# Altium PCB extensionV1.0.PcbDoc (part 1 of 2)
Units mm, origin at the board's own origin, x right, y up, seen from the top; angles counter-clockwise.
Board outline 110.36 x 57.4 mm, 2 copper layers (Top Layer, Bottom Layer); 166 components, 161 nets, 516 pads, 220 vias.
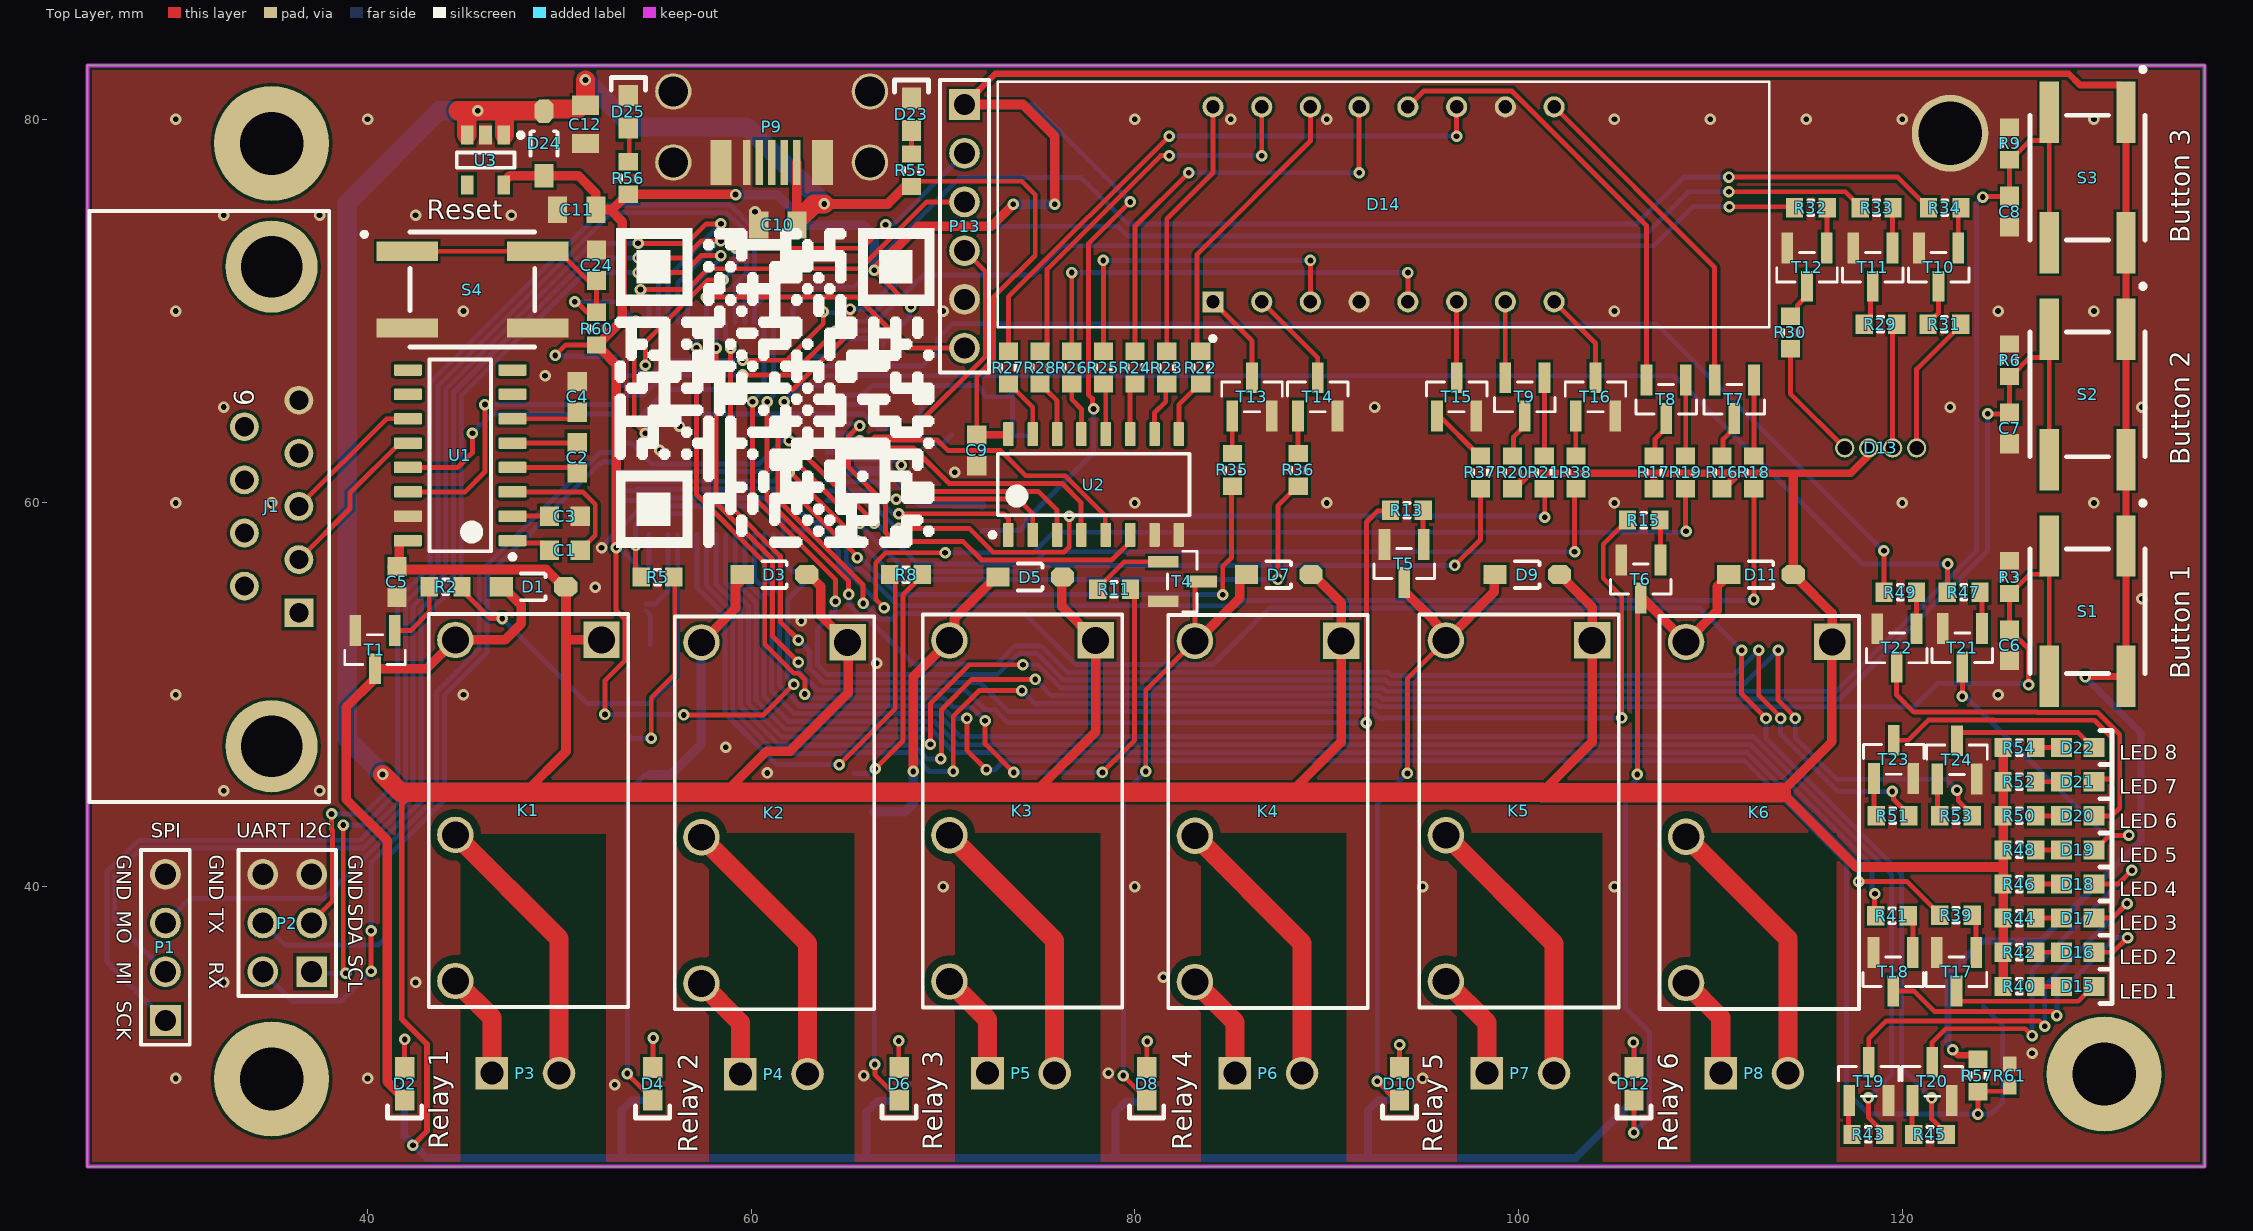
[diagram p0: Top Layer view]
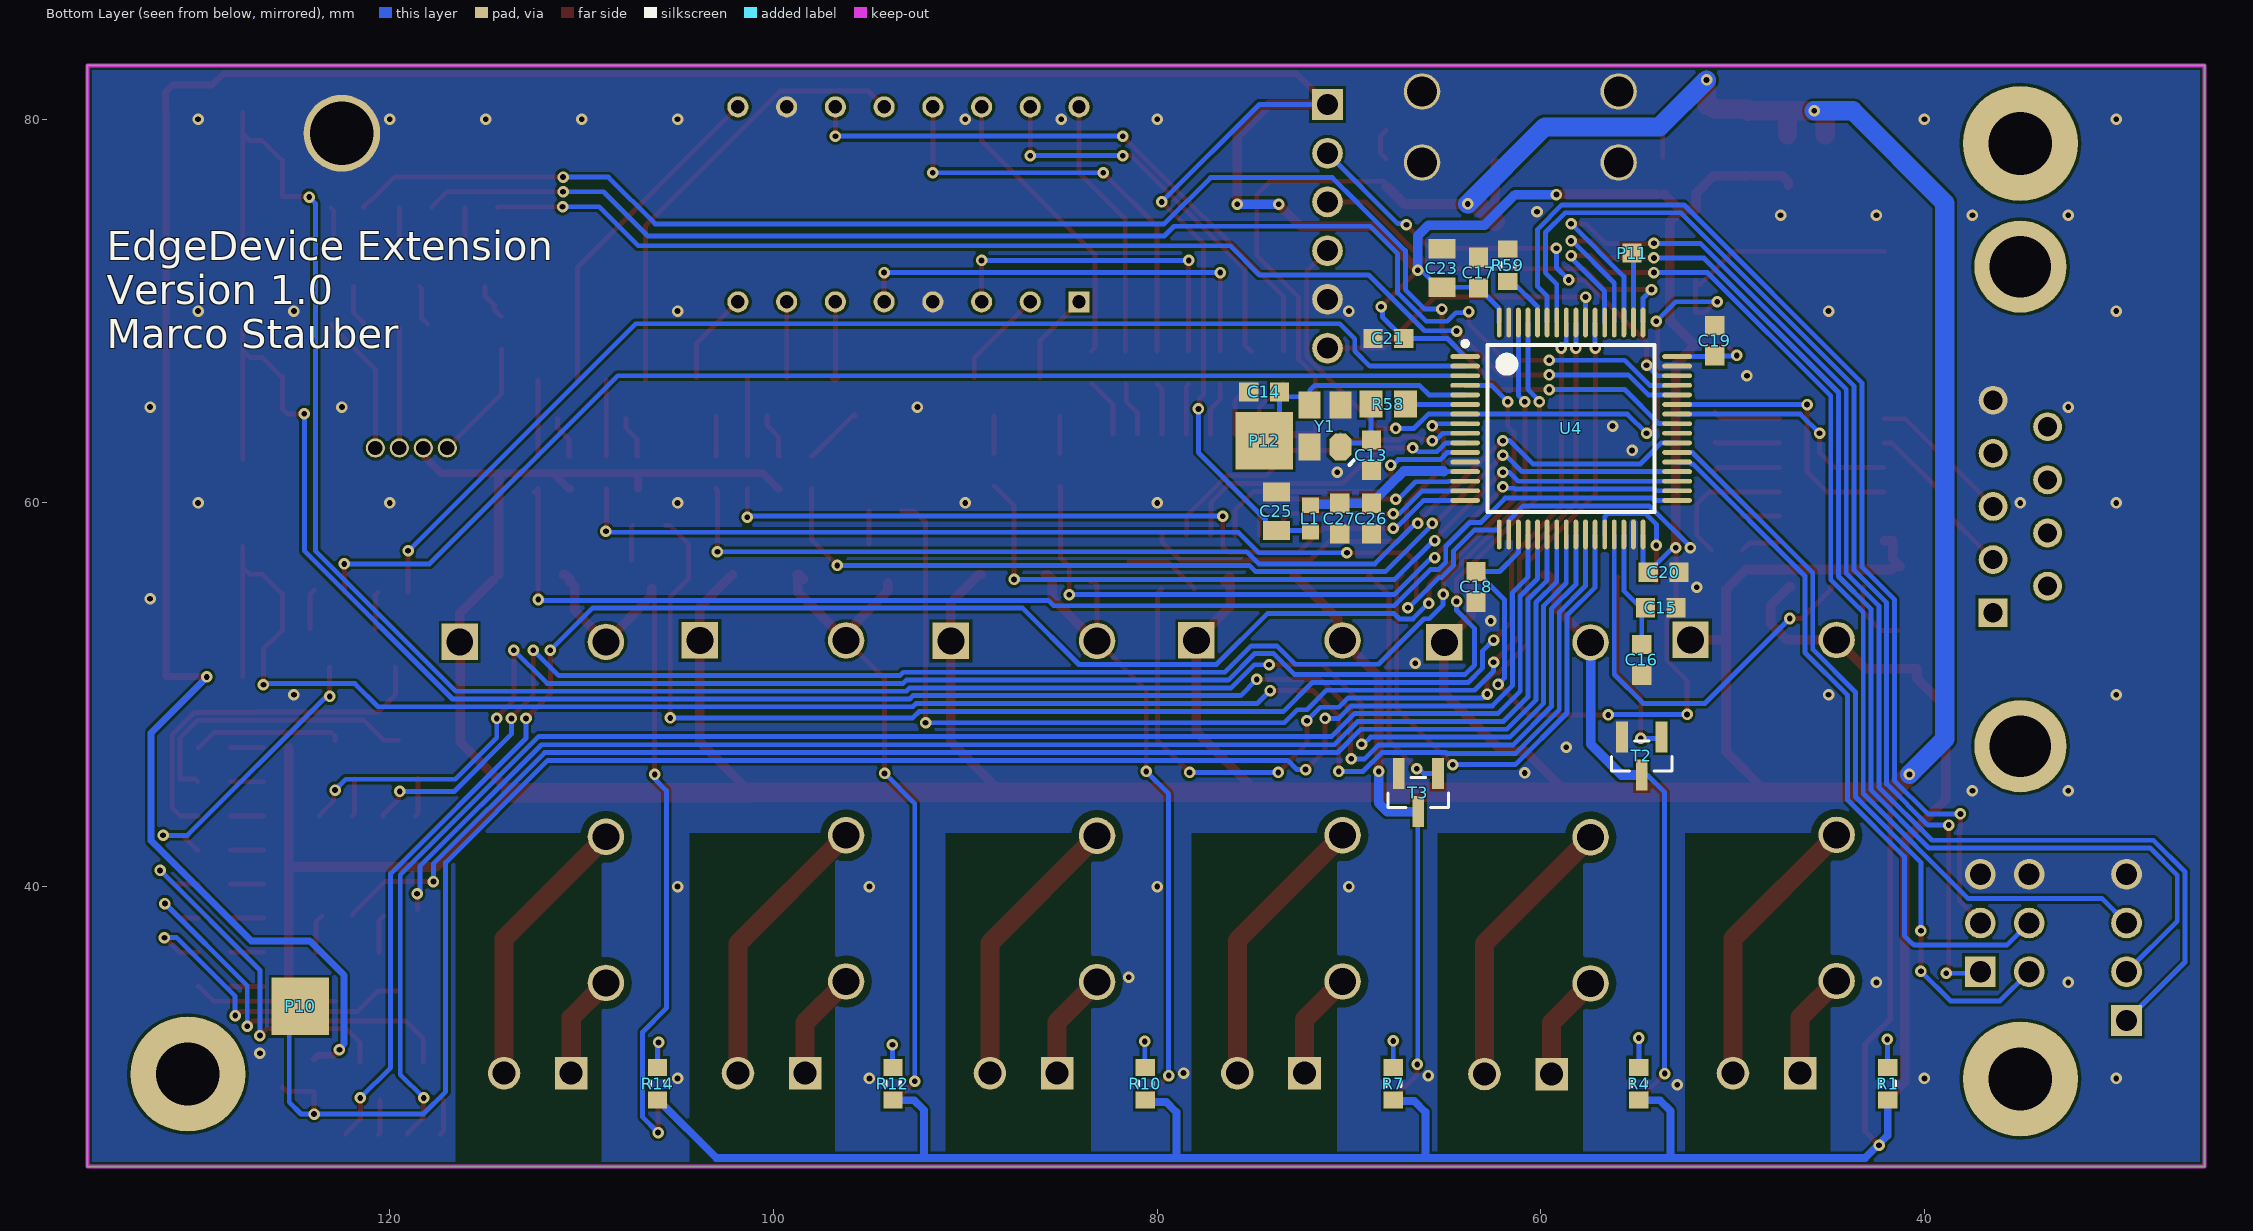
[diagram p1: Bottom Layer view, seen from below]
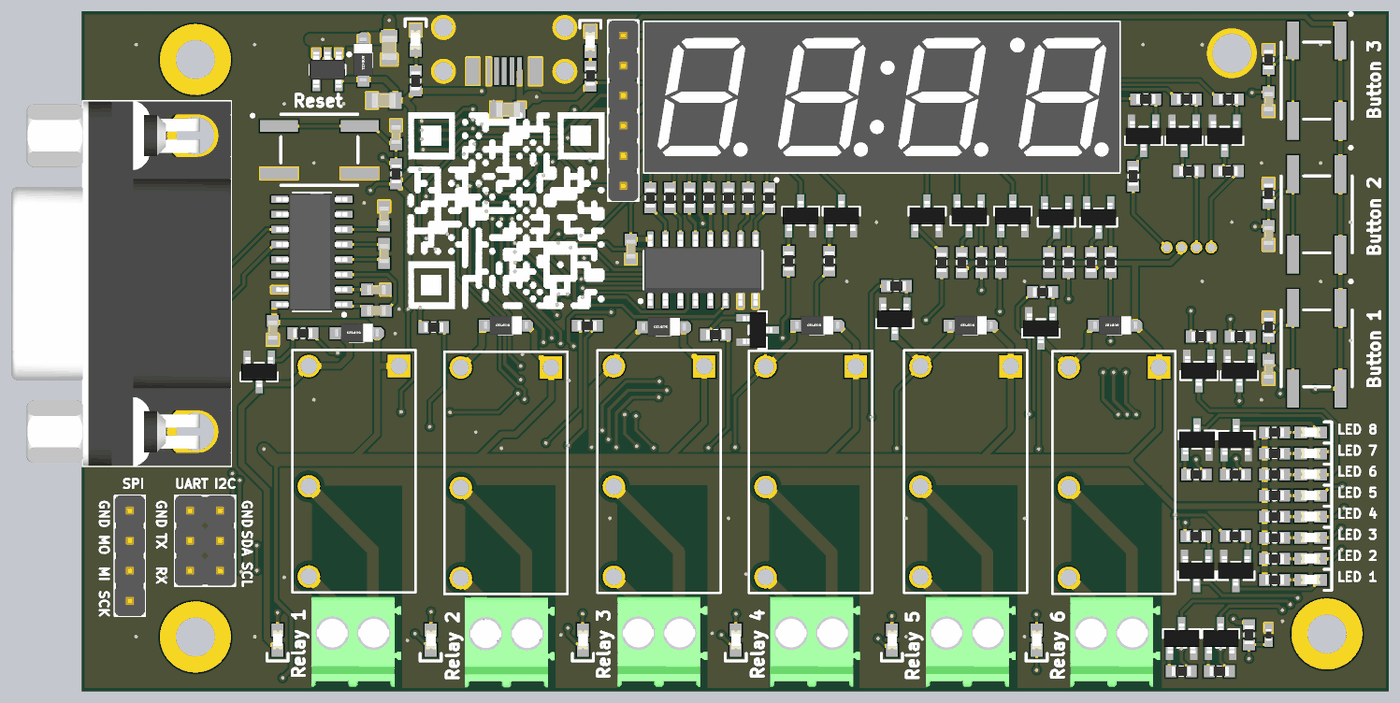
[diagram p3: 3D render of the assembled board from above, using the file's embedded part models]
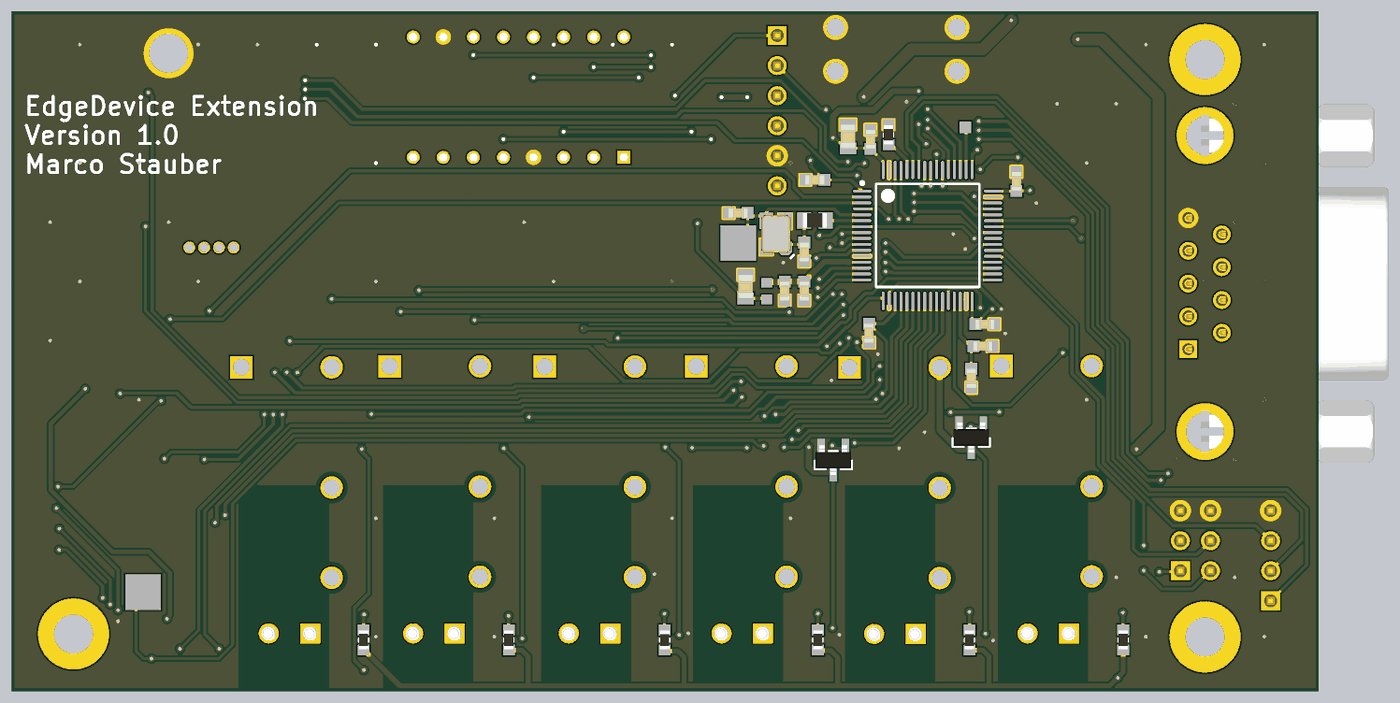
[diagram p4: 3D render of the assembled board from below, using the file's embedded part models]

## Layer stack, top to bottom
Top Solder: solder mask 0.0102, Solder Resist, Dk 3.5
Top Layer: signal copper 0.0356
Dielectric 1: dielectric 0.32, FR-4, Dk 4.8
Bottom Layer: signal copper 0.0356
Bottom Solder: solder mask 0.0102, Solder Resist, Dk 3.5

## Board outline
25.4,25.4 135.763,25.4 135.763,82.804 25.4,82.804

## Design rules (kind name [scope] priority, off if disabled: settings)
Clearance "Schematic Clearance Constraint_11" [InNet('NetK1_2')] p1: gap=0.4 ignorepadtopadclearanceinfootprint=FALSE
Clearance "Schematic Clearance Constraint_10" [InNet('NetK1_3')] p2: gap=0.4 ignorepadtopadclearanceinfootprint=FALSE
Clearance "Schematic Clearance Constraint_9" [InNet('NetK2_3')] p3: gap=0.4 ignorepadtopadclearanceinfootprint=FALSE
Clearance "Schematic Clearance Constraint_8" [InNet('NetK6_3')] p4: gap=0.4 ignorepadtopadclearanceinfootprint=FALSE
Clearance "Schematic Clearance Constraint_7" [InNet('NetK4_2')] p5: gap=0.4 ignorepadtopadclearanceinfootprint=FALSE
Clearance "Schematic Clearance Constraint_6" [InNet('NetK4_3')] p6: gap=0.4 ignorepadtopadclearanceinfootprint=FALSE
Clearance "Schematic Clearance Constraint_5" [InNet('NetK3_2')] p7: gap=0.4 ignorepadtopadclearanceinfootprint=FALSE
Clearance "Schematic Clearance Constraint_4" [InNet('NetK3_3')] p8: gap=0.4 ignorepadtopadclearanceinfootprint=FALSE
Clearance "Schematic Clearance Constraint" [InNet('NetK2_2')] p9: gap=0.4 ignorepadtopadclearanceinfootprint=FALSE
Clearance "Schematic Clearance Constraint_3" [InNet('NetK5_2')] p10: gap=0.4 ignorepadtopadclearanceinfootprint=FALSE
Clearance "Schematic Clearance Constraint_2" [InNet('NetK5_3')] p11: gap=0.4 ignorepadtopadclearanceinfootprint=FALSE
Clearance "Schematic Clearance Constraint_1" [InNet('NetK6_2')] p12: gap=0.4 ignorepadtopadclearanceinfootprint=FALSE
Clearance [All] p13: gap=0.152 ignorepadtopadclearanceinfootprint=FALSE
Height [All] p1: minheight=0 maxheight=50 prefheight=12.7
HoleSize [All] p1: absolutevalues=TRUE maxlimit=5.6 minlimit=0.3 maxpercent=80.000 minpercent=20.000
HoleToHoleClearance [All] p1: gap=0.305 allowstackedmicrovias=TRUE
MinimumSolderMaskSliver [All] p1: minsoldermaskwidth=0.152
PlaneConnect [All] p1: planeconnectstyle=Direct reliefexpansion=0.508 reliefentries=4 reliefconductorwidth=0.254 reliefairgap=0.254
PolygonConnect [All] p1: connectstyle=Direct reliefconductorwidth=0.254 reliefentries=4 polygonreliefangle="90 Angle" airgapwidth=0.254
RoomDefinition U_uc [InComponentClass('U_uc')] p1 off: confinementstyle=ConfineIn formatcopy=TRUE lockcomponents=FALSE outline 0,0 50.8,0 50.8,25.4 0,25.4
RoomDefinition U_sensor [InComponentClass('U_sensor')] p2 off: confinementstyle=ConfineIn formatcopy=TRUE lockcomponents=FALSE outline 0,0 50.8,0 50.8,25.4 0,25.4
RoomDefinition U_PWR [InComponentClass('U_PWR')] p3 off: confinementstyle=ConfineIn formatcopy=TRUE lockcomponents=FALSE outline 0,0 50.8,0 50.8,25.4 0,25.4
RoomDefinition U_led [InComponentClass('U_led')] p4 off: confinementstyle=ConfineIn formatcopy=TRUE lockcomponents=FALSE outline 0,0 50.8,0 50.8,25.4 0,25.4
RoomDefinition U_IO [InComponentClass('U_IO')] p5 off: confinementstyle=ConfineIn formatcopy=TRUE lockcomponents=FALSE outline 0,0 50.8,0 50.8,25.4 0,25.4
RoomDefinition U_COM [InComponentClass('U_COM')] p6 off: confinementstyle=ConfineIn formatcopy=TRUE lockcomponents=FALSE outline 0,0 50.8,0 50.8,25.4 0,25.4
RoomDefinition extension [InComponentClass('extension')] p7 off: confinementstyle=ConfineIn formatcopy=TRUE lockcomponents=FALSE outline 0,0 50.8,0 50.8,25.4 0,25.4
RoutingVias [All] p1: holewidth=0.3 width=0.6 viastyle="Through Hole" minholewidth=0.3 minwidth=0.6 maxholewidth=5.2 maxwidth=8
SolderMaskExpansion [All] p1: expansion=0.102
UnRoutedNet [All] p1: checkbadconnections=TRUE
Width [All] p1: maxlimit=20 minlimit=0.152 preferedwidth=0.152
24 further rules are at their usual default settings.

## Classes and differential pairs
component class U_PWR: C10 C11 C12 D23 D24 D25 P9 R55 R56 U U3
component class U_uc: C13 C14 C15 C16 C17 C18 C19 C20 C21 C23 C24 C25 C26 C27 L1 P11 P12 P13 R58 R59 R60 S4 U4 Y1
component class U_sensor: P10 R57 R61
component class U_led: C9 D13 D14 D15 D16 D17 D18 D19 D20 D21 D22 R16 R17 R18 R19 R20 R21 R22 R23 R24 R25 R26 R27 R28 R29 R30 R31 R32 R33 R34 R35 R36 R37 R38 R39 R40 R41 R42 R43 R44 R45 R46 R47 R48 R49 R50 R51 R52 R53 R54 T7 T8 T9 T10 T11 T12 T13 T14 T15 T16 T17 T18 T19 T20 T21 T22 T23 T24 U2
component class U_IO: C6 C7 C8 D1 D2 D3 D4 D5 D6 D7 D8 D9 D10 D11 D12 K1 K2 K3 K4 K5 K6 P3 P4 P5 P6 P7 P8 R1 R2 R3 R4 R5 R6 R7 R8 R9 R10 R11 R12 R13 R14 R15 S1 S2 S3 T1 T2 T3 T4 T5 T6
component class U_COM: C1 C2 C3 C4 C5 J1 U1
component class extension: P1 P2

## Components (designator, comment, footprint, x,y, rotation, side; value= is the part's Value field where it differs from the comment)
C1 "1uF" "CAP_0603i_1608m -N" 50.292,57.531 r0 top
C2 "1uF" "CAP_0603i_1608m -N" 50.927,62.357 r270 top
C3 "1uF" "CAP_0603i_1608m -N" 50.292,59.309 r180 top
C4 "1uF" "CAP_0603i_1608m -N" 50.927,65.532 r270 top
C5 "1uF" "CAP_0603i_1608m -N" 41.529,55.88 r90 top
C6 "100nF" "CAP_0603i_1608m -N" 125.603,52.578 r90 top
C7 "100nF" "CAP_0603i_1608m -N" 125.603,63.881 r90 top
C8 "100nF" "CAP_0603i_1608m -N" 125.603,75.184 r90 top
C9 "100nF" "CAP_0603i_1608m -N" 71.755,62.738 r90 top
C10 "10uF" "CAP_0805i_2012m -N" 61.392,74.498 r0 top
C11 "10uF" "CAP_0805i_2012m -N" 50.902,75.286 r0 top
C12 "10uF" "CAP_0805i_2012m -N" 51.359,79.731 r90 top
C13 "22pF" "CAP_0603i_1608m -N" 68.834,62.484 r90 bottom
C14 "22pF" "CAP_0603i_1608m -N" 74.422,65.786 r180 bottom
C15 "1uF" "CAP_0603i_1608m -N" 53.746,54.534 r0 bottom
C16 "1uF" "CAP_0603i_1608m -N" 54.737,51.816 r90 bottom
C17 "100nF" "CAP_0603i_1608m -N" 63.246,72.009 r90 bottom
C18 "100nF" "CAP_0603i_1608m -N" 63.373,55.626 r90 bottom
C19 "100nF" "CAP_0603i_1608m -N" 50.927,68.453 r270 bottom
C20 "100nF" "CAP_0603i_1608m -N" 53.594,56.388 r180 bottom
C21 "100nF" "CAP_0603i_1608m -N" 67.945,68.58 r180 bottom
C23 "10uF" "CAP_0805i_2012m -N" 65.151,72.247 r270 bottom
C24 "100nF" "CAP_0603i_1608m -N" 51.943,72.39 r270 top
C25 "10uF" "CAP_0805i_2012m -N" 73.787,59.563 r270 bottom
C26 "100nF" "CAP_0603i_1608m -N" 68.834,59.182 r90 bottom
C27 "1uF" "CAP_0603i_1608m -N" 70.485,59.182 r90 bottom
D1 "Diode  Schottky" SOD123 48.641,55.626 r180 top
D2 "Orange" *0603 41.935,29.718 r90 top
D3 "Diode  Schottky" SOD123 61.214,56.261 r180 top
D4 "Orange" *0603 54.864,29.718 r90 top
D5 "Diode  Schottky" SOD123 74.549,56.134 r180 top
D6 "Orange" *0603 67.716,29.718 r90 top
D7 "Diode  Schottky" SOD123 87.503,56.261 r180 top
D8 "Orange" *0603 80.62,29.718 r90 top
D9 "Diode  Schottky" SOD123 100.457,56.261 r180 top
D10 "Orange" *0603 93.802,29.718 r90 top
D11 "Diode  Schottky" SOD123 112.649,56.261 r180 top
D12 "Orange" *0603 106.02,29.718 r90 top
D13 "848" Adafruit-848 120.757,62.865 r180 top
D14 "7 Segment" TDCG1060M 92.964,75.565 r0 top
D15 "Grün" *0603 129.159,34.798 r180 top
D16 "Grün" *0603 129.159,36.576 r180 top
D17 "Grün" *0603 129.159,38.354 r180 top
D18 "Grün" *0603 129.159,40.132 r180 top
D19 "Grün" *0603 129.159,41.91 r180 top
D20 "Grün" *0603 129.159,43.688 r180 top
D21 "Grün" *0603 129.159,45.466 r180 top
D22 "Grün" *0603 129.159,47.244 r180 top
D23 "Grün" *0603 68.351,80.264 r270 top
D24 "Diode  Schottky" SOD123 49.2,78.74 r270 top
D25 "Grün" *0603 53.594,80.391 r270 top
J1 "618009231121" 618009231121 31.75,59.817 r270 top
K1 "ALQ305" PNSC-LQ-4-2000x1000x1600_V 52.197,52.857 r270 top
K2 "ALQ305" PNSC-LQ-4-2000x1000x1600_V 65.024,52.73 r270 top
K3 "ALQ305" PNSC-LQ-4-2000x1000x1600_V 77.953,52.832 r270 top
K4 "ALQ305" PNSC-LQ-4-2000x1000x1600_V 90.754,52.807 r270 top
K5 "ALQ305" PNSC-LQ-4-2000x1000x1600_V 103.835,52.832 r270 top
K6 "ALQ305" PNSC-LQ-4-2000x1000x1600_V 116.357,52.756 r270 top
L1 "Inductor" "IND_0603i_1608m -L" 72.009,59.182 r270 bottom
P1 "Header 4" HDR1X4 29.464,33.02 r90 top
P2 "Header 3X2" HDR2X3 37.084,35.56 r90 top
P3 "Header 2" "3.5MM Phoenix Contact 1984617" 46.482,30.272 r0 top
P4 "Header 2" "3.5MM Phoenix Contact 1984617" 59.436,30.226 r0 top
P5 "Header 2" "3.5MM Phoenix Contact 1984617" 72.319,30.272 r0 top
P6 "Header 2" "3.5MM Phoenix Contact 1984617" 85.217,30.272 r0 top
P7 "Header 2" "3.5MM Phoenix Contact 1984617" 98.354,30.272 r0 top
P8 "Header 2" "3.5MM Phoenix Contact 1984617" 110.546,30.272 r0 top
P9 "USB Micro B" MCR-B-S-RA-SMT-EH4B-T/R 61.066,77.749 r180 top
P10 "Temp" Pad_3x3mm 124.663,33.757 r180 bottom
P11 "JTDI" Pad_0603 55.245,73.025 r90 bottom
P12 "MC" Pad_3x3mm 74.422,63.246 r0 bottom
P13 "Header 6" HDR1X6 71.12,80.772 r270 top
R1 "270" "RES_0603i_1608m -N" 41.91,29.718 r270 bottom
R2 "3k" "RES_0603i_1608m -N" 44.069,55.626 r0 top
R3 "10k" "RES_0603i_1608m -N" 125.603,56.134 r270 top
R4 "270" "RES_0603i_1608m -N" 54.889,29.718 r270 bottom
R5 "3k" "RES_0603i_1608m -N" 55.118,56.134 r180 top
R6 "10k" "RES_0603i_1608m -N" 125.603,67.437 r270 top
R7 "270" "RES_0603i_1608m -N" 67.691,29.718 r270 bottom
R8 "3k" "RES_0603i_1608m -N" 68.072,56.261 r180 top
R9 "10k" "RES_0603i_1608m -N" 125.603,78.74 r270 top
R10 "270" "RES_0603i_1608m -N" 80.62,29.718 r270 bottom
R11 "3k" "RES_0603i_1608m -N" 78.918,55.499 r0 top
R12 "270" "RES_0603i_1608m -N" 93.777,29.718 r270 bottom
R13 "3k" "RES_0603i_1608m -N" 94.183,59.614 r180 top
R14 "270" "RES_0603i_1608m -N" 106.045,29.718 r270 bottom
R15 "3k" "RES_0603i_1608m -N" 106.528,59.106 r180 top
R16 "270" "RES_0603i_1608m -N" 110.617,61.595 r270 top
R17 "270" "RES_0603i_1608m -N" 107.061,61.595 r270 top
R18 "11k" "RES_0603i_1608m -N" 112.268,61.595 r270 top
R19 "11k" "RES_0603i_1608m -N" 108.712,61.595 r270 top
R20 "270" "RES_0603i_1608m -N" 99.695,61.595 r90 top
R21 "11k" "RES_0603i_1608m -N" 101.346,61.595 r90 top
R22 "270" "RES_0603i_1608m -N" 83.439,67.056 r270 top
R23 "270" "RES_0603i_1608m -N" 81.661,67.056 r270 top
R24 "270" "RES_0603i_1608m -N" 80.01,67.056 r270 top
R25 "270" "RES_0603i_1608m -N" 78.359,67.056 r270 top
R26 "270" "RES_0603i_1608m -N" 76.708,67.056 r270 top
R27 "270" "RES_0603i_1608m -N" 73.406,67.056 r270 top
R28 "270" "RES_0603i_1608m -N" 75.057,67.056 r270 top
R29 "270" "RES_0603i_1608m -N" 118.872,69.317 r0 top
R30 "270" "RES_0603i_1608m -N" 114.173,68.885 r270 top
R31 "270" "RES_0603i_1608m -N" 122.199,69.317 r0 top
R32 "11k" "RES_0603i_1608m -N" 115.24,75.387 r0 top
R33 "11k" "RES_0603i_1608m -N" 118.669,75.387 r0 top
R34 "11k" "RES_0603i_1608m -N" 122.225,75.387 r0 top
R35 "11k" "RES_0603i_1608m -N" 85.09,61.722 r90 top
R36 "11k" "RES_0603i_1608m -N" 88.519,61.722 r90 top
R37 "11k" "RES_0603i_1608m -N" 98.019,61.595 r90 top
R38 "11k" "RES_0603i_1608m -N" 102.997,61.595 r90 top
R39 "165k" "RES_0603i_1608m -N" 122.809,38.506 r180 top
R40 "3k" "RES_0603i_1608m -N" 126.111,34.798 r180 top
R41 "165k" "RES_0603i_1608m -N" 119.47,38.481 r180 top
R42 "3k" "RES_0603i_1608m -N" 126.111,36.576 r180 top
R43 "165k" "RES_0603i_1608m -N" 118.237,27.076 r0 top
R44 "3k" "RES_0603i_1608m -N" 126.111,38.354 r180 top
R45 "165k" "RES_0603i_1608m -N" 121.451,27.076 r0 top
R46 "3k" "RES_0603i_1608m -N" 126.111,40.132 r180 top
R47 "165k" "RES_0603i_1608m -N" 123.206,55.344 r180 top
R48 "3k" "RES_0603i_1608m -N" 126.111,41.91 r180 top
R49 "165k" "RES_0603i_1608m -N" 119.904,55.344 r180 top
R50 "3k" "RES_0603i_1608m -N" 126.111,43.688 r180 top
R51 "165k" "RES_0603i_1608m -N" 119.507,43.688 r0 top
R52 "3k" "RES_0603i_1608m -N" 126.111,45.466 r180 top
R53 "165k" "RES_0603i_1608m -N" 122.809,43.688 r0 top
R54 "3k" "RES_0603i_1608m -N" 126.111,47.244 r180 top
R55 "270" "RES_0603i_1608m -N" 68.351,77.343 r270 top
R56 "270" "RES_0603i_1608m -N" 53.594,76.937 r270 top
R57 "1.3k" "RES_0603i_1608m -N" 123.952,30.15 r270 top
R58 "390" "RES_0805i_2012m -N" 67.945,65.151 r0 bottom
R59 "10k" "RES_0603i_1608m -N" 61.722,72.39 r270 bottom
R60 "10k" "RES_0603i_1608m -N" 51.943,69.088 r90 top
R61 "10k,ptc" "RES_0402i_1005m -N" 125.603,30.15 r270 top
S1 "EVQ-Q2U02W" EVQQ2 129.667,54.356 r270 top
S2 "EVQ-Q2U02W" EVQQ2 129.667,65.659 r270 top
S3 "EVQ-Q2U02W" EVQQ2 129.667,76.962 r270 top
S4 "EVQ-Q2U02W" EVQQ2 45.466,71.12 r0 top
T1 "Part Number: MMBT3904-7-F" SOT-23-M 40.386,52.349 r180 top value=Value
T2 "Part Number: MMBT3904-7-F" SOT-23-M 54.737,46.812 r0 bottom value=Value
T3 "Part Number: MMBT3904-7-F" SOT-23-M 66.387,44.903 r0 bottom value=Value
T4 "Part Number: MMBT3904-7-F" SOT-23-M 82.474,55.905 r270 top value=Value
T5 "Part Number: MMBT3904-7-F" SOT-23-M 94.04,56.841 r180 top value=Value
T6 "Part Number: MMBT3904-7-F" SOT-23-M 106.375,56.032 r180 top value=Value
T7 "Part Number: MMBT3904-7-F" SOT-23-M 111.252,65.405 r180 top value=Value
T8 "Part Number: MMBT3904-7-F" SOT-23-M 107.696,65.405 r180 top value=Value
T9 "Part Number: MMBT3904-7-F" SOT-23-M 100.33,65.532 r180 top value=Value
T10 "Part Number: MMBT3904-7-F" SOT-23-M 121.9,72.288 r180 top value=Value
T11 "Part Number: MMBT3904-7-F" SOT-23-M 118.471,72.288 r180 top value=Value
T12 "Part Number: MMBT3904-7-F" SOT-23-M 115.042,72.288 r180 top value=Value
T13 "Part Number: MMBT3904-7-F" SOT-23-M 86.106,65.532 r0 top value=Value
T14 "Part Number: MMBT3904-7-F" SOT-23-M 89.535,65.532 r0 top value=Value
T15 "Part Number: MMBT3904-7-F" SOT-23-M 96.774,65.532 r0 top value=Value
T16 "Part Number: MMBT3904-7-F" SOT-23-M 104.013,65.532 r0 top value=Value
T17 "Part Number: MMBT3904-7-F" SOT-23-M 122.834,35.56 r180 top value=Value
T18 "Part Number: MMBT3904-7-F" SOT-23-M 119.532,35.56 r180 top value=Value
T19 "Part Number: MMBT3904-7-F" SOT-23-M 118.262,29.845 r0 top value=Value
T20 "Part Number: MMBT3904-7-F" SOT-23-M 121.564,29.845 r0 top value=Value
T21 "Part Number: MMBT3904-7-F" SOT-23-M 123.139,52.451 r180 top value=Value
T22 "Part Number: MMBT3904-7-F" SOT-23-M 119.727,52.447 r180 top value=Value
T23 "Part Number: MMBT3904-7-F" SOT-23-M 119.558,46.634 r0 top value=Value
T24 "Part Number: MMBT3904-7-F" SOT-23-M 122.86,46.609 r0 top value=Value
U1 "MAX232DR" D0016A_N 44.831,62.484 r180 top
U2 "CD4543BM96" D0016A_L 77.851,60.96 r90 top
U3 "MIC5504-3.3YM5-TR" MCHP-SOT-23-M5_V 46.152,77.876 r270 top
U4 "STM32F401RBT6" STM-LQFP64_L 58.42,63.881 r180 bottom
Y1 "XTAL3" "TSX-3225 2*2.5" 71.247,64.008 r270 bottom

## Footprints (in the part's own frame and the unit in brackets; to place one, negate y for a bottom-side part, rotate by r counter-clockwise, add the part's x,y. Pads: shape width x height; smd on the part's side, far side on the other; paste and mask are expansions set on the pad)
"3.5MM Phoenix Contact 1984617" [mm]
  rect 1.7x1.7 hole 1.2: 1(0,0)
  round 1.7 hole 1.2: 2(3.5,0)
  body extent -1.67,-4.53 5.9,3.07, height 25.89
618009231121 [mm] "9 pins, right angled, 8.08mm, with hex screw"
  rect 1.5x1.5 hole 1: 1(5.54,4.67)
  round 1.5 hole 1: 2(2.77,4.67) 3(0,4.67) 4(-2.77,4.67) 5(-5.54,4.67) 6(4.155,1.83) 7(1.385,1.83) 8(-1.385,1.83) 9(-4.155,1.83)
  round 4.8 hole 3.2: M1(-12.5,3.25) M2(12.5,3.25)
  silkscreen extent -15.4,-6.25 15.4,6.25, body extent -15.4,-12.25 15.4,6.25, height 12.55
*0603 [mm]
  rect 1.1x1 smd: 1(-0.85,0) 2(0.85,0)
  silkscreen extent -1.78,-0.89 -1.14,0.89, body extent -0.8,-0.42 0.8,0.38, height 0.8
Adafruit-848 [mm]
  round 1 hole 0.75: 1(2.5,0) 2(3.75,0) 3(1.25,0) 4(0,0)
"CAP_0603i_1608m -N" [mm] "Chip Capacitor, Body 1.6x0.8mm, IPC Medium Density"
  rect 1x1 smd: 1(-0.8,0) 2(0.8,0)
  body extent -0.8,-0.4 0.8,0.4, height 0.8
"CAP_0805i_2012m -N" [mm] "Chip Capacitor, Body 2.0x1.3mm, IPC Medium Density"
  rect 1x1.4 smd: 1(-1,0) 2(1,0)
  body extent -1,-0.62 1,0.63, height 0.6
D0016A_L [mm] "SOIC, 16-Leads, Body 10x4mm, Pitch 1.27mm, IPC High Density"
  rrect18% 1.25x0.55 smd: 1(-2.625,4.445) 2(-2.625,3.175) 3(-2.625,1.905) 4(-2.625,0.635) 5(-2.625,-0.635) 6(-2.625,-1.905) 7(-2.625,-3.175) 8(-2.625,-4.445) 9(2.625,-4.445) 10(2.625,-3.175) 11(2.625,-1.905) 12(2.625,-0.635) 13(2.625,0.635) 14(2.625,1.905) 15(2.625,3.175) 16(2.625,4.445)
  silkscreen extent -2.75,-5 1.6,5.39, body extent -3,-4.95 3,4.95, height 1.59
D0016A_N [mm] "SOIC, 16-Leads, Body 10x4mm, Pitch 1.27mm, IPC Medium Density"
  rrect17% 1.45x0.6 smd: 1(-2.725,4.445) 2(-2.725,3.175) 3(-2.725,1.905) 4(-2.725,0.635) 5(-2.725,-0.635) 6(-2.725,-1.905) 7(-2.725,-3.175) 8(-2.725,-4.445) 9(2.725,-4.445) 10(2.725,-3.175) 11(2.725,-1.905) 12(2.725,-0.635) 13(2.725,0.635) 14(2.725,1.905) 15(2.725,3.175) 16(2.725,4.445)
  silkscreen extent -2.85,-5 1.6,5.42, body extent -3,-4.95 3,4.95, height 1.59
EVQQ2 [mm]
  rect 3.2x1 smd: 1(-3.4,2) 2(-3.4,-2) 3(3.4,-2) 4(3.4,2)
  silkscreen extent -5.75,-3 3.25,3
HDR1X4 [mm] "Connector; Header; 4 Position"
  rect 1.6x1.6 hole 1.1: 1(0,0)
  round 1.6 hole 1.1: 2(2.54,0) 3(5.08,0) 4(7.62,0)
  silkscreen extent -1.27,-1.27 8.89,1.27, body extent -1.27,-1.27 8.89,1.27, height 10.3
HDR1X6 [mm] "Connector; Header; 6 Position"
  rect 1.6x1.6 hole 1.1: 1(0,0)
  round 1.6 hole 1.1: 2(2.54,0) 3(5.08,0) 4(7.62,0) 5(10.16,0) 6(12.7,0)
  silkscreen extent -1.27,-1.27 13.97,1.27, body extent -1.27,-1.27 13.97,1.27, height 10.3
HDR2X3 [mm] "Connector; Header; 3x2 Position"
  rect 1.6x1.6 hole 1.1: 1(0,0)
  round 1.6 hole 1.1: 2(0,2.54) 3(2.54,0) 4(2.54,2.54) 5(5.08,0) 6(5.08,2.54)
  silkscreen extent -1.27,-1.27 6.35,3.81, body extent -1.27,-1.27 6.35,3.81, height 10.3
"IND_0603i_1608m -L" [mm] "Chip Inductor, Body 1.6x0.8mm, IPC High Density"
  rect 0.8x0.9 smd: 1(-0.7,0) 2(0.7,0)
  body extent -0.87,-0.48 0.87,0.48, height 0.71
MCHP-SOT-23-M5_V [mm] "SOT-23, 5-Leads, Body 3x1.7mm, Pitch 0.95mm"
  rect 1x0.66 smd: 1(-1.3,0.95) 2(-1.3,0) 3(-1.3,-0.95) 4(1.3,-0.95) 5(1.3,0.95)
  silkscreen extent -1.42,-1.5 0.4,1.96, body extent -1.5,-1.5 1.5,1.5, height 1.45
MCR-B-S-RA-SMT-EH4B-T/R [mm]
  rect 0.4x2.35 smd: 1(-1.3,0) 2(-0.65,0) 3(0,0) 4(0.65,0) 5(1.3,0)
  round 1.9 hole 1.55: 6(-5.125,0) 6(-5.125,-3.7) 6(5.125,0) 6(5.125,-3.7)
  rect 1.1x2.35 smd: 6(-2.65,0) 6(2.65,0)
Pad_3x3mm [mm]
  rect 3x3 smd: 1(0,0)
Pad_0603 [mm]
  rect 1x1 smd: 1(0,0)
PNSC-LQ-4-2000x1000x1600_V [mm] "LQ, 4-Leads, Body 20x10mm"
  rect 1.9x1.9 hole 1.4: 1(0,0)
  round 1.9 hole 1.4: 2(17.78,-7.62) 3(10.16,-7.62) 4(0,-7.62)
  silkscreen extent -1.35,-9.01 19.13,1.39, body extent -1.31,-9.01 19.09,1.39, height 16.6
"RES_0402i_1005m -N" [mm] "Chip Resistor, Body 1.1x0.5mm, IPC Medium Density"
  rect 0.8x0.7 smd: 1(-0.6,0) 2(0.6,0)
  body extent -0.5,-0.25 0.5,0.25, height 0.3
"RES_0603i_1608m -N" [mm] "Chip Resistor, Body 1.6x0.8mm, IPC Medium Density"
  rect 0.9x1 smd: 1(-0.85,0) 2(0.85,0)
  silkscreen extent -0.13,-0.38 0.13,0.38, body extent -0.8,-0.4 0.8,0.4, height 0.4
"RES_0805i_2012m -N" [mm] "Chip Resistor, Body 2.0x1.3mm, IPC Medium Density"
  rect 1.2x1.4 smd: 1(-0.9,0) 2(0.9,0)
  body extent -1,-0.62 1,0.63, height 0.5
SOD123 [mm] "SOD123  2-Leads, Body, IPC Medium Density"
  rect 1.22x1 smd: 1(1.681,0)
  oct 1.22x1 smd: 2(-1.681,0)
  silkscreen extent -0.64,-0.7 0.64,0.7, body extent -1.85,-0.84 1.85,0.76, height 1.27
SOT-23-M [mm]
  rect 0.61x1.61 smd paste+0 mask+0: 1(-1.025,-0.995) 2(1.025,-0.995) 3(0,0.995)
  silkscreen extent -1.58,-0.78 1.58,0.78, body extent -1.5,-1.25 1.5,1.25, height 1.06
STM-LQFP64_L [mm] "Thin QFP, 64-Leads, Body 10x10mm, Pitch 0.5mm, IPC High Density"
  oval 1.55x0.25 smd: 1(-5.525,3.75) 2(-5.525,3.25) 3(-5.525,2.75) 4(-5.525,2.25) 5(-5.525,1.75) 6(-5.525,1.25) 7(-5.525,0.75) 8(-5.525,0.25) 9(-5.525,-0.25) 10(-5.525,-0.75) 11(-5.525,-1.25) 12(-5.525,-1.75) 13(-5.525,-2.25) 14(-5.525,-2.75) 15(-5.525,-3.25) 16(-5.525,-3.75) 33(5.525,-3.75) 34(5.525,-3.25) 35(5.525,-2.75) 36(5.525,-2.25) 37(5.525,-1.75) 38(5.525,-1.25) 39(5.525,-0.75) 40(5.525,-0.25) 41(5.525,0.25) 42(5.525,0.75) 43(5.525,1.25) 44(5.525,1.75) 45(5.525,2.25) 46(5.525,2.75) 47(5.525,3.25) 48(5.525,3.75)
  oval 0.25x1.55 smd: 17(-3.75,-5.525) 18(-3.25,-5.525) 19(-2.75,-5.525) 20(-2.25,-5.525) 21(-1.75,-5.525) 22(-1.25,-5.525) 23(-0.75,-5.525) 24(-0.25,-5.525) 25(0.25,-5.525) 26(0.75,-5.525) 27(1.25,-5.525) 28(1.75,-5.525) 29(2.25,-5.525) 30(2.75,-5.525) 31(3.25,-5.525) 32(3.75,-5.525) 49(3.75,5.525) 50(3.25,5.525) 51(2.75,5.525) 52(2.25,5.525) 53(1.75,5.525) 54(1.25,5.525) 55(0.75,5.525) 56(0.25,5.525) 57(-0.25,5.525) 58(-0.75,5.525) 59(-1.25,5.525) 60(-1.75,5.525) 61(-2.25,5.525) 62(-2.75,5.525) 63(-3.25,5.525) 64(-3.75,5.525)
  silkscreen extent -5.65,-4.35 4.35,4.55, body extent -5,-5 5,5, height 1.6
TDCG1060M [mm]
  rect 1.1x1.1 hole 0.7: 1(-8.89,-5.08)
  round 1.1 hole 0.7: 2(-6.35,-5.08) 3(-3.81,-5.08) 4(-1.27,-5.08) 5(1.27,-5.08) 6(3.81,-5.08) 7(6.35,-5.08) 8(8.89,-5.08) 9(8.89,5.08) 10(6.35,5.08) 11(3.81,5.08) 12(1.27,5.08) 13(-1.27,5.08) 14(-3.81,5.08) 15(-6.35,5.08) 16(-8.89,5.08)
  silkscreen extent -20.1,-7.12 20.1,6.4, body extent -20.1,-6.4 20.1,6.4, height 7
"TSX-3225 2*2.5" [mm]
  oct 1.4x1.15 smd: 1(1.1,0.8)
  rect 1.4x1.15 smd: 2(-1.1,0.8) 3(-1.1,-0.8) 4(1.1,-0.8)
  silkscreen extent 1.78,1.27 2.03,1.52, body extent -1.6,-1.23 1.6,1.27, height 0.6

## Part data
C1 C2 C3 C4 C5 C6 C7 C8 C9 C10 C11 C12 C13 C14 C15 C16 C17 C18 C19 C20 C21 C23 C24 C25 C26 C27: library part Cap, "capacitor"
D1 D3 D5 D7 D9 D11 D24: "Schottky Diode"
D2 D4 D6 D8 D10 D12: library part LTST-C191KFKT, "LED; SMD; 0603; orange; 45-90mcd; 1.6x0.8x0.55mm; 130°; 2÷2.4V; 20mA", Package="0603 Lite-On", Digi-Key_Part_Number=160-1445-1-ND, Digi-Key_Purchase_URL=https://www.digikey.com/product-detail/en/lite-on-inc/LTST-C191KFKT/160-1445-1-ND/386832?utm_source=snapeda&utm_medium=aggregator&utm_campaign=symbol, MF="Lite-On Inc.", MP=LTST-C191KFKT, SnapEDA_Link=https://www.snapeda.com/parts/LTST-C191KFKT/Lite-On%20Inc./view-part/?ref=snap
D13: library part Adafruit-848
D14: library part TDCG1060M
D15 D16 D17 D18 D19 D20 D21 D22 D23 D25: library part LTST-C191KGKT, "LED; SMD; 0603; grün; 35mcd; 1.6x0.8x0.55mm; 130Â°; 2Ã·2.V; 20mA", Package="0603 Lite-On", Digi-Key_Part_Number=160-1446-1-ND, Digi-Key_Purchase_URL=https://www.digikey.ch/product-detail/de/lite-on-inc/LTST-C191KGKT/160-1446-1-ND/386834, MF="Lite-On Inc.", MP=LTST-C191KGKT, SnapEDA_Link=https://www.snapeda.com/parts/LTST-C191KFKT/Lite-On%20Inc./view-part/?ref=snap
J1: library part CMP-1502-00200-1, "Female PCB Connector with Hex Screw WR-DSUB, 8.08 mm, Angled, 9 pins", Contact Resistance=30mOhm, Manufacturer="Wurth Elektronik", Operating Temperature=-40to85degC, Rated Current=3A, Working Voltage=125VAC, Datasheet URL=https://katalog.we-online.de/em/datasheet/6180xx231121.pdf, Gender=Female, Manufacturer URL=http://www.we-online.de, Mounting Technology=THT, Orientation=Angled, Package Reference=618009231121, Packaging=Tray, Part Number=618009231121, Pin Number=9, Publisher=WurthElektronik
K1 K2 K3 K4 K5 K6: library part CMP-1503-00188-1, "LQ Relays, 5 V Coil Voltage, 200 mW Nominal Operating Power, -40 to 85 degC, 4-Pin LQ, Carton, Case, RoHS", Coil Voltage="5 V", Manufacturer=Panasonic, Max Switching Current="10 A (N.O.), 3 A (N.C.)", Max Switching Voltage="250 V AC", Nominal Operating Power="200 mW", ComponentLink1Description="Manufacturer URL", ComponentLink1URL=http://www3.panasonic.biz/ac/ae/index.jsp, ComponentLink2Description=Datasheet, ComponentLink2URL=http://www3.panasonic.biz/ac/e_download/control/relay/power/catalog/mech_eng_lq.pdf?f_cd=401220, ComponentLink3Description="Package Specification", ComponentLink3URL=http://www3.panasonic.biz/ac/e_download/control/relay/power/catalog/mech_eng_lq.pdf?f_cd=401220, DatasheetVersion=201410-T, Electrical Life=5x10^4, Mechanical Life(Min.operation)=1x10^7, Mounting Technology="Through Hole", PackageDescription="4-Pin Through Hole Terminal Package, Body 20 x 10 mm", PackageReference=LQ-4-2000x1000x1600, PackageVersion="ASCTB92E, 10/2014", Packing="Carton, Case", PartNumber=ALQ305, Pb-Free=True, RoHS=True, Series="LQ Relays"
P1: "Header, 4-Pin"
P2: "Header, 3-Pin, Dual row"
P3 P4 P5 P6 P7 P8: "Header, 2-Pin"
P9: library part "USB Mikro B"
P10 P11 P12: library part Pad, "Single Pad or Testpoint"
P13: "Header, 6-Pin"
R1 R2 R3 R4 R5 R6 R7 R8 R9 R10 R11 R12 R13 R14 R15 R16 R17 R18 R19 R20 R21 R22 R23 R24 R25 R26 R27 R28 R29 R30 R31 R32 R33 R34 R35 R36 R37 R38 R39 R40 R41 R42 R43 R44 R45 R46 R47 R48 R49 R50 R51 R52 R53 R54 R55 R56 R57 R58 R59 R60: library part Res, "Resistor"
R61: library part Res, "temp sensor, ptc / 10k"
S1 S2 S3 S4: "White Button Tactile Switch, Single Pole Single Throw (SPST) 20 mA @ 15 V dc 0.7mm", Manufacturer_Name=Panasonic, Mouser Part Number=667-EVQ-Q2U02W, Datasheet Link=https://componentsearchengine.com/Datasheets/1/EVQ-Q2U02W.pdf, Manufacturer_Part_Number=EVQ-Q2U02W, Mouser Price/Stock=https://www.mouser.com/Search/Refine.aspx?Keyword=667-EVQ-Q2U02W
T1 T2 T3 T4 T5 T6 T7 T8 T9 T10 T11 T12 T13 T14 T15 T16 T17 T18 T19 T20 T21 T22 T23 T24: library part MMBT3904-7-F, "No Description Available", Built_By=EMA_UL_Team, Copyright="Copyright (C) 2018 Accelerated Designs. All rights reserved", Manufacturer_Part_Number=MMBT3904-7-F, RefDes=RefDes, Type=DEV, Vendor="Diodes Inc"
U1: library part CMP-0299-00150-2, "Dual EIA-232 Driver / Receiver, 0 to 70 degC, 16-Pin SOIC (D), Green (RoHS & no Sb/Br)", Drivers Per Package=2, Supply Voltage(s)(V)=5, ComponentLink1Description="Manufacturer URL", ComponentLink1URL=www.ti.com, ComponentLink2Description=Datasheet, ComponentLink2URL=http://www.ti.com/general/docs/lit/getliterature.tsp?genericPartNumber=MAX232&fileType=pdf, ComponentLink3Description="Package Specification", ComponentLink3URL=http://www.ti.com/litv/pdf/mpds178g, DatasheetVersion=SLLS047L, ESD HBM(kV)=+/-2, ICC(Max)(mA)=10, PackageDescription="16-Pin Plastic Small Outline Integrated Circuit, 9.9 x 3.9 mm, Pitch 1.27 mm Pitch", PackageReference=D0016A, PackageVersion="revM, Jun-2011", Receivers Per Package=2, RS-232=TRUE, Single Supply=TRUE, SubFamily=RS-232
U2: library part CMP-0388-00008-2, "CMOS BCD-to-7-Segment Latch / Decoder / Driver for Liquid-Crystal Displays, 3 V, -55 to 125 degC, 16-pin SOIC (D16), Green (RoHS & no Sb/Br)", Manufacturer="Texas Instruments", Rating=Catalog, Code_JEDEC=MS-012, ComponentLink1Description="Manufacturer URL", ComponentLink1URL=http://www.ti.com/, ComponentLink2Description=Datasheet, ComponentLink2URL=http://www.ti.com/general/docs/lit/getliterature.tsp?genericPartNumber=CD4543B&fileType=pdf, ComponentLink3Description="Package Specification", ComponentLink3URL=http://www.ti.com/litv/pdf/mpds178g, DatasheetVersion=SCHS086D, Eco-Plan="Green (RoHS & no Sb/Br)", Mounting Technology="Surface Mount", PackageDescription="16-Pin Plastic Small Outline, Body 9.90 x 3.90 mm, Pitch 1.27 mm", PackageReference=D0016A, PackageVersion=4040047-6/M, PartNumber=CD4543BM96, SubFamily="Discrete Segment LED Driver", Vin(Min)(V)=3
U3: library part CMP-2000-07604-1, "Single LDO, 2.5 to 5.5 V, Fixed Out 3.3 V, 0.3 A, -40 to 125 degC, 5-Pin SOT-23 (M5), RoHS, Tape and Reel", Case\/Package=SOT-23, Dropout Voltage=160mV, Manufacturer=Microchip, Max Input Voltage=5.5V, Max Operating Temperature=125degC, Min Current Limit=400mA, Min Input Voltage=2.5V, Min Operating Temperature=-40degC, Nominal Output Voltage=3.3V, Output Current=300mA, Package Description="5-Pin Small Outline Transistor, Body 1.6 x 2.9 mm, Pitch 0.95 mm", Datasheet URL=http://ww1.microchip.com/downloads/en/DeviceDoc/MIC550X.pdf, Datasheet Version="Rev. 2.3, 04/2015", Lead Free=LeadFree, Manufacturer URL=http://www.microchip.com/, Mount=SurfaceMount, Mounting Technology=SurfaceMount, Number of Pins=5, Number of Regulators=1, Output Voltage=3.3V, Package Reference=SOT-23, Packaging=CutTape, REACH SVHC=NoSVHC, RoHSCompliant=True
U4: library part CMP-0243-00094-2, "ARM Cortex-M4 32-bit MCU+FPU, 105 DMIPS, 128 kB Flash, 64 kB Internal RAM, 48 I/Os, 64-pin LQFP, -40 to 85 degC, Tray", I/Os (High Current)=48, Manufacturer=STMicroelectronics, Operating Frequency(F) (Processor speed) (MHz)=84, Supply Voltage(Vcc) max (V)=3.6, Supply Voltage(Vcc) min (V)=1.8, ComponentLink1Description="Manufacturer URL", ComponentLink1URL=http://www.st.com/web/en/home.html, ComponentLink2Description=Datasheet, ComponentLink2URL=http://www.st.com/st-web-ui/static/active/en/resource/technical/document/data_brief/DM00071938.pdf, ComponentLink3Description="Package Specification", ComponentLink3URL=http://www.st.com/st-web-ui/static/active/en/resource/technical/document/datasheet/DM00037051.pdf, Core="ARM Cortex-M4", DatasheetVersion="Rev. 1", FLASH Size (Prog) (kB)=128, Internal RAM Size (kB)=64, Mounting Technology="Surface Mount", PackageDescription="64-Pin Low Profile Quad Flat Package, 10 x 10 mm Body, 0.5 mm Pitch", PackageReference=LQFP64, PackageVersion="Rev. 4, 06/2013", Packing=Tray, PartNumber=STM32F401RBT6
Y1: "Industrial Ceramic Resonator"

## Free pads (board coordinates)
  round 6 hole 3.3: 6(35,29.972) 6(35,78.74) 6(130.531,30.226)
  round 4 hole 3.3: 6(122.504,79.273)

## Via types
v1: diameter 0.6, hole 0.3, Top Layer to Bottom Layer, tented both sides, 220 vias

## Nets (pads, with @x,y where several pads share a name; then routed paths per layer and width w, separated by ;. In a path a pad name is that pad's centre, name@x,y a point inside that pad or via, vN(x,y) a via of type N, cw(c..) or ccw(c..) an arc to the next point about the centre after c; other vN are vias at no path point)
+3.3: C11.2 C17.1 C18.2 C19.2 C20.1 C21.2 C23.2 C25.2 D24.1 L1.2 P13.1 R56.2 R57.1 R60.1 S1.1 S1.4 S2.1 S2.4 S3.1 S3.4 U3.5 U4.1 U4.19 U4.32 U4.48 U4.64 | length 271.8
  Top Layer w0.254: v1(49.784,67.691) 50.331,68.238 R60.1@51.943,68.238 ; v1(52.375,48.971) 52.375,50.74 53.426,51.792 53.426,53.923 52.959,54.391 v1(52.959,57.658) ; v1(56.49,48.946) 60.63,48.946 62.224,50.54 v1(62.227,50.54) ; v1(66.421,72.136) v1(68.326,70.231) ; v1(77.851,64.897) 77.785,64.963 77.785,65.435 77.58,65.64 77.58,73.516 v1(79.756,75.692)
  Top Layer w0.35: P13.1@71.12,80.772 72.725,82.377 128.686,82.377 129.275,81.787 131.342,81.787 131.699,81.43 131.699,80.394 S3.1@131.667,80.362 S3.4@131.667,73.562 S2.1@131.667,69.059 S2.4@131.667,62.259 S1.1@131.667,57.756 S1.4@131.667,50.956 129.569,50.956 v1(129.54,50.927) ; v1(122.631,31.496) 122.927,31.2 123.752,31.2 R57.1@123.952,31
  Top Layer w0.5: U3.5@47.102,76.576 47.102,76.746 47.419,77.064 D24.1@48.925,77.064 ; D24.1@49.2,77.059 50.982,77.059 51.902,76.14 C11.2@51.902,75.286 ; R60.1@51.943,68.238 R60.1@51.993,68.238 ; v1(52.959,57.658) 52.959,67.222 52.193,67.988 52.193,68.038 R60.1@51.993,68.238 ; R56.2@53.594,76.087 53.544,76.087 52.768,75.311 51.927,75.311 C11.2@51.902,75.286 ; R56.2@53.944,76.092 59.163,76.092 v1(59.182,76.073) ; v1(66.421,72.136) 68.707,74.422 72.517,74.422 v1(73.66,75.565) ; P13.1@71.12,80.772 74.168,80.772 75.819,79.121 v1(75.819,75.565) ; C11.2@51.902,75.286 52.654,75.286 53.273,74.667 53.273,69.518 R60.1@51.993,68.238
  Bottom Layer w0.254: v1(49.784,67.691) 49.822,67.653 C19.2@50.927,67.653 50.949,67.631 U4.48@52.895,67.631 ; v1(52.375,48.971) 56.464,48.971 v1(56.49,48.946) ; v1@53.19,57.592 C20.1@54.394,56.388 ; C20.1@54.648,56.388 54.67,56.41 U4.32@54.67,58.356 ; U4.19@61.17,58.356 61.172,58.354 61.172,57.408 62.154,56.426 C18.2@63.373,56.426 61.885,54.938 61.885,50.882 v1(62.227,50.54) ; U4.64@62.17,69.406 62.172,69.408 62.172,70.135 C17.1@63.246,71.209 63.284,71.247 C23.2@65.151,71.247 65.351,71.247 66.24,72.136 v1(66.421,72.136) ; U4.1@63.299,67.631 U4.1@63.945,67.631 64.886,68.572 66.232,68.572 66.24,68.58 66.891,68.58 C21.2@66.891,68.199 ; C21.2@67.145,68.58 68.26,69.695 68.26,70.165 v1(68.326,70.231) ; P13.1@71.12,80.772 74.676,80.772 v1(79.756,75.692) ; L1.2@72.009,58.482 72.09,58.563 C25.2@73.787,58.563 73.987,58.563 74.36,58.936 74.36,59.136 77.851,62.627 v1(77.851,64.897)
  Bottom Layer w0.35: v1(122.631,31.496) 122.631,31.564 122.395,31.8 122.395,35.383 124.172,37.16 127.221,37.16 132.453,42.393 132.453,48.014 v1(129.54,50.927)
  Bottom Layer w0.5: v1(59.182,76.073) 61.341,76.073 62.932,74.482 65.853,74.482 66.421,73.914 v1(66.421,72.136) ; v1(73.66,75.565) v1(75.819,75.565)
+5: C5.2 C9.2 C10.2 C12.2 D1.2 D3.2 D5.2 D7.2 D9.2 D11.2 D13.1 D24.2 K1.1 K2.1 K3.1 K4.1 K5.1 K6.1 P9.1 R1.2 R4.2 R7.2 R10.2 R12.2 R14.2 R16.2 R17.2 R20.1 R40.2 R42.2 R44.2 R46.2 R48.2 R50.2 R52.2 R54.2 R55.2 U1.16 U2.16 U3.1 U3.3 | length 420.4
  Top Layer w0.25: R55.2@68.148,76.769 71.374,76.769 74.107,76.769 74.803,76.073 74.803,72.898 72.629,70.724 72.629,67.482 71.755,66.609 C9.2@71.755,63.538
  Top Layer w0.3: v1(42.367,26.518) 43.104,27.254 43.104,31.775 41.783,33.096 41.783,44.309 42.393,44.919
  Top Layer w0.4: C9.2@71.755,63.538 71.778,63.561 73.382,63.561 U2.16@73.406,63.585 ; R20.1@99.695,60.745 99.745,60.745 100.547,61.547 107.061,61.547 ; R17.2@107.061,60.745 107.061,61.547 ; R16.2@110.567,60.745 R16.2@110.617,60.745 110.667,60.745 111.469,61.547 ; D13.1@118.257,62.865 118.257,62.479 117.326,61.547 114.384,61.547 114.33,61.493 114.276,61.547 111.469,61.547 ; 107.061,61.547 111.469,61.547
  Top Layer w0.5: C5.2@41.275,56.68 41.662,57.067 41.662,58.02 U1.16@42.087,58.02 ; C5.2@41.529,56.68 41.681,56.528 49.31,56.528 50.343,55.495 50.343,52.807 ; 48.221,44.919 50.343,47.041 50.343,52.807 ; K1.1@52.197,52.857 50.394,52.857 50.343,52.807 ; 58.508,44.919 58.663,44.919 60.809,47.065 62.025,47.065 65.049,50.089 65.049,52.705 K2.1@65.024,52.73 63.627,54.127 63.627,55.646 D3.2@63.119,56.154 ; P9.1@62.379,77.724 62.379,74.685 62.379,74.511 C10.2@62.392,74.498 ; v1(63.805,75.586) 67.115,75.586 68.022,76.493 R55.2@68.072,76.493 ; 74.803,44.919 77.953,48.069 K3.1@77.953,52.832 76.194,54.591 76.194,56.098 D5.2@76.23,56.134 ; D5.2@76.237,56.134 76.487,55.884 D5.2@76.487,55.878 ; 88.138,44.919 90.754,47.535 K4.1@90.754,52.807 90.754,54.801 89.294,56.261 D7.2@89.184,56.261 ; 101.219,44.919 103.835,47.535 K5.1@103.835,52.832 103.835,54.564 102.395,56.005 102.395,56.011 102.145,56.261 D9.2@102.138,56.261 ; D11.2@114.33,56.261 114.33,61.493 ; D11.2@114.587,56.005 116.357,54.234 K6.1@116.357,52.756 116.332,52.73 116.332,47.547 113.704,44.919 117.602,41.021 125.261,41.021 ; R40.2@125.261,34.798 R42.2@125.261,36.576 R44.2@125.261,38.354 R46.2@125.261,40.132 125.261,41.021 ; R54.2@125.261,47.244 R52.2@125.261,45.466 R50.2@125.261,43.688 R48.2@125.261,41.91 125.261,41.021
  Top Layer w1: v1(40.784,45.847) 41.712,44.919 42.393,44.919 48.221,44.919 58.508,44.919 ; 44.729,80.442 v1(45.745,80.442) 47.134,80.442 ; U3.3@45.169,79.176 45.169,80.374 ; U3.1@47.134,79.176 47.134,80.442 ; D24.2@49.2,80.421 D24.2@49.2,80.442 ; v1(51.359,82.052) C12.2@51.359,80.731 51.159,80.731 50.959,80.531 49.2,80.531 D24.2@49.2,80.442 ; 58.663,44.919 59.676,44.919 ; 59.665,44.919 74.803,44.919 88.138,44.919 101.219,44.919 101.243,44.895 113.68,44.895 113.704,44.919 ; C10.2@62.379,74.685 63.279,75.586 v1(63.805,75.586) ; 47.134,80.442 D24.2@49.2,80.442
  Bottom Layer w0.4: R1.2@41.91,28.868 41.91,27.026 43.083,25.852 53.238,25.852 ; R4.2@54.889,28.868 53.789,28.868 53.238,28.317 53.238,25.852 ; R7.2@67.691,28.868 67.644,28.821 66.591,28.821 66.015,28.245 66.015,25.852 ; R10.2@80.62,28.868 80.522,28.77 79.52,28.77 78.994,28.245 78.994,25.852 ; R12.2@93.777,28.868 92.677,28.868 92.151,28.342 92.151,25.852 ; R14.2@106.045,28.868 105.995,28.868 102.979,25.852 92.151,25.852 ; 53.238,25.852 66.015,25.852 ; 66.015,25.852 78.994,25.852 ; 78.994,25.852 92.151,25.852
  Bottom Layer w1: v1(40.784,45.847) 38.938,47.693 38.938,75.641 43.739,80.442 v1(45.745,80.442) ; v1(51.359,82.052) 53.807,79.604 55.245,79.604 59.787,79.604 v1(63.805,75.586)
A1: U2.5 U4.9 | length 17.5
  Top Layer w0.254: v1(65.659,63.246) 65.725,63.312 66.303,63.312 66.435,63.444 67.181,63.444 67.354,63.271 69.71,63.271 70.244,62.738 72.987,62.738 74.308,61.417 76.378,61.417 78.454,59.341 78.454,58.367 U2.5@78.486,58.335
  Bottom Layer w0.254: U4.9@63.945,63.631 65.115,63.631 65.5,63.246 v1(65.659,63.246)
B1: U2.3 U4.11 | length 15
  Top Layer w0.254: v1(67.818,61.976) 67.818,61.112 68.326,60.604 74.962,60.604 75.946,59.62 U2.3@75.946,58.335
  Bottom Layer w0.254: U4.11@63.945,62.631 63.947,62.629 64.882,62.629 65.251,62.26 67.44,62.26 67.724,61.976 v1(67.818,61.976)
BUTTON_1: C6.2 R3.2 S1.2 S1.3 U4.26 | length 97.6
  Top Layer w0.254: v1(70.536,45.999) 70.536,48.876 71.88,50.221 v1(74.112,50.221) ; v1(126.59,50.525) 126.59,52.391 125.641,53.34 125.565,53.34 C6.2@125.603,53.378 R3.2@125.603,55.284 125.653,55.284 126.652,56.283 127.294,56.283 S1.2@127.667,56.656 ; S1.3@127.667,50.956 S1.2@127.667,56.656 ; S1.2@127.667,57.756 S1.2@127.667,56.656
  Bottom Layer w0.254: U4.26@57.67,58.356 57.67,55.674 59.04,54.304 59.04,49.218 61.323,46.934 64.832,46.934 64.863,46.904 64.941,46.982 68.29,46.982 69.272,45.999 v1(70.536,45.999) ; v1(74.112,50.221) 74.788,49.545 92.565,49.545 92.737,49.373 120.62,49.373 121.826,50.579 126.535,50.579 v1(126.59,50.525)
BUTTON_2: C7.2 R6.2 S2.2 S2.3 U4.25 | length 102
  Top Layer w0.254: v1(69.875,46.66) 69.921,46.706 69.921,49.22 71.501,50.8 v1(74.803,50.8) ; v1(124.46,64.643) 125.349,64.643 125.603,64.897 R6.2@125.603,66.587 125.653,66.587 126.652,67.586 127.294,67.586 S2.2@127.667,67.959 ; S2.3@127.667,62.259 S2.2@127.667,67.959 ; S2.2@127.667,69.059 S2.2@127.667,67.959
  Bottom Layer w0.254: U4.25@58.17,58.356 58.17,55.749 59.446,54.473 59.446,49.386 61.444,47.389 68.458,47.389 69.187,46.66 v1(69.875,46.66) ; v1(74.803,50.8) 75.651,49.952 92.733,49.952 92.906,49.779 116.734,49.779 124.46,57.506 v1(124.46,64.643)
BUTTON_3: C8.2 R9.2 S3.2 S3.3 U4.24 | length 112.1
  Top Layer w0.254: v1(69.342,47.422) 69.342,49.53 71.374,51.562 v1(74.168,51.562) ; v1(124.206,75.946) 124.244,75.984 C8.2@125.603,75.984 R9.2@125.603,77.89 125.653,77.89 126.652,78.889 127.294,78.889 S3.2@127.667,79.262 ; S3.3@127.667,73.562 S3.2@127.667,79.262 ; S3.2@127.667,80.362 S3.2@127.667,79.262
  Bottom Layer w0.254: U4.24@58.67,58.356 58.67,55.824 59.853,54.641 59.853,49.555 61.612,47.795 68.875,47.795 69.248,47.422 v1(69.342,47.422) ; v1(74.168,51.562) 74.93,51.562 76.134,50.358 92.902,50.358 93.074,50.186 116.565,50.186 123.881,57.501 123.881,75.621 v1(124.206,75.946)
C1: U2.2 U4.14 | length 12.5
  Top Layer w0.254: v1(67.564,60.198) 73.914,60.198 74.676,59.436 U2.2@74.676,58.335
  Bottom Layer w0.254: U4.14@63.945,61.131 63.947,61.129 64.817,61.129 64.843,61.104 66.531,61.104 67.437,60.198 v1(67.564,60.198)
D1: U2.4 U4.10 | length 16.4
  Top Layer w0.254: v1(66.675,62.865) 68.462,62.865 70.316,61.011 76.209,61.011 77.184,60.036 77.184,58.367 U2.4@77.216,58.335
  Bottom Layer w0.254: U4.10@63.945,63.131 63.947,63.129 64.957,63.129 65.419,62.667 66.383,62.667 66.581,62.865 v1(66.675,62.865)
DIG_1: R35.1 U4.34 | length 40.1
  Top Layer w0.254: v1(61.976,60.833) 61.976,60.77 65.532,57.214 v1(65.532,57.15) ; v1(84.582,55.22) 84.582,56.693 85.04,57.151 85.04,60.872 R35.1@85.09,60.872
  Bottom Layer w0.254: U4.34@52.895,60.631 52.897,60.633 54.001,60.633 54.092,60.725 61.341,60.725 61.383,60.767 61.91,60.767 v1(61.976,60.833) ; v1(65.532,57.15) 65.707,57.15 67.637,55.22 v1(84.582,55.22)
DIG_2: R36.1 U4.35 | length 42.4
  Top Layer w0.254: v1(61.976,61.595) 62.033,61.595 65.532,58.096 v1(65.532,58.039) ; v1(87.457,56.012) 87.457,59.86 88.469,60.872 R36.1@88.519,60.872
  Bottom Layer w0.254: U4.35@52.895,61.131 61.173,61.131 61.637,61.595 v1(61.976,61.595) ; v1(65.532,58.039) 65.589,58.039 67.617,56.012 v1(87.457,56.012)
DIG_3: R37.1 U4.36 | length 51.4
  Top Layer w0.254: v1(61.976,62.484) 65.532,58.928 v1(65.659,58.928) ; v1(96.672,56.744) 98.019,58.09 R37.1@98.019,60.745
  Bottom Layer w0.254: U4.36@52.895,61.631 60.978,61.631 61.831,62.484 v1(61.976,62.484) ; v1(65.659,58.928) 65.659,58.871 68.111,56.418 74.865,56.418 75.19,56.744 v1(96.672,56.744)
DIG_4: R38.1 U4.39 | length 57.3
  Top Layer w0.254: v1(61.976,63.246) 62.033,63.246 64.345,60.934 64.472,60.934 66.421,58.985 v1(66.421,58.928) ; v1(102.921,57.455) 102.921,60.669 R38.1@102.997,60.745
  Bottom Layer w0.254: U4.39@52.895,63.131 52.897,63.129 53.711,63.129 54.803,62.037 60.419,62.037 61.628,63.246 v1(61.976,63.246) ; v1(66.421,58.928) 66.548,58.928 68.651,56.825 74.697,56.825 75.327,57.455 v1(102.921,57.455)
DP: R21.1 U4.16 | length 41.8
  Top Layer w0.254: v1(67.691,58.674) 71.374,58.674 72.617,57.431 76.308,57.431 76.581,57.704 v1(76.581,59.309) ; R21.1@101.346,60.745 101.371,60.72 v1(101.371,59.258)
  Bottom Layer w0.254: U4.16@63.945,60.131 66.11,60.131 67.567,58.674 v1(67.691,58.674) ; v1(76.581,59.309) 101.321,59.309 v1(101.371,59.258)
GND: C3.1 C4.1 C5.1 C6.1 C7.1 C8.1 C9.1 C10.1 C11.1 C12.1 C13.1 C14.1 C15.1 C16.1 C17.2 C18.1 C19.1 C20.2 C21.1 C23.1 C24.1 C25.1 C26.1 C27.1 D14.4 D14.10 D23.1 D25.1 J1.5 P1.4 P2.5 P2.6 P9.5 P9.6 P13.5 pad.6@122.504,79.273 R3.1 R6.1 R9.1 R59.1 R61.1 S4.2 S4.3 T1.2 T2.2 T3.2 T4.2 T5.2 T6.2 T10.2 T11.2 T12.2 T13.2 T14.2 T15.2 T16.2 T17.2 T18.2 T19.2 T20.2 T21.2 T22.2 T23.2 T24.2 U1.15 U2.7 U2.8 U3.2 U4.12 U4.18 U4.31 U4.47 U4.63 Y1.2 Y1.4 | length 11.4
  Bottom Layer w0.254: v1(52.197,57.658) 52.197,57.715 54.206,59.725 54.242,59.725 54.36,59.842 60.906,59.842 61.67,59.078 U4.18@61.67,58.356
  other v1: 52.892,29.67 30,30 40,30 95,30 105,30 65.862,30.15 78.622,30.279 126.774,31.312 32.5,35 42.5,35 81.484,35.277 70,40 80,40 95,40 105,40 32.5,45 37.5,45 60.833,45.923 58.674,47.269 30,50 45,50 125,50 66.548,51.638 62.611,53.848 132.5,55 51.867,55.601 30,60 35,60 80,60 90,60 105,60 120,60 130,60 70.612,61.595 55.245,62.738 56.261,64.008 32.5,65 92.5,65 122.5,65 132.5,65 49.251,66.624 30,70 45,70 70,70 105,70 125,70 130,70 32.5,75 37.5,75 42.5,75 47.5,75 60.198,75.184 30,80 40,80 80,80 85,80 90,80 105,80 110,80 115,80 120,80 130,80